# Altium PCB magnets_carrier.PcbDoc
Units mm, origin at the board's own origin, x right, y up, seen from the top; angles counter-clockwise.
Board outline 88.6 x 17.2 mm, 2 copper layers (Top Layer, Bottom Layer); 7 components, 13 nets, 26 pads, 6 vias.
Unrouted connection lines stored in the file: 1.
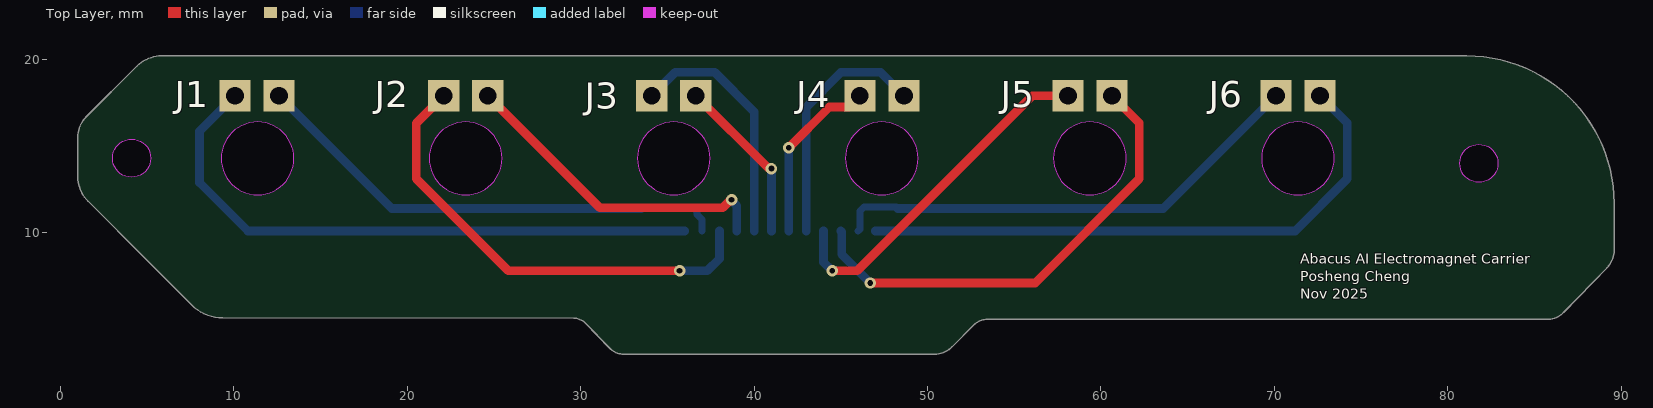
[diagram p0: Top Layer view]
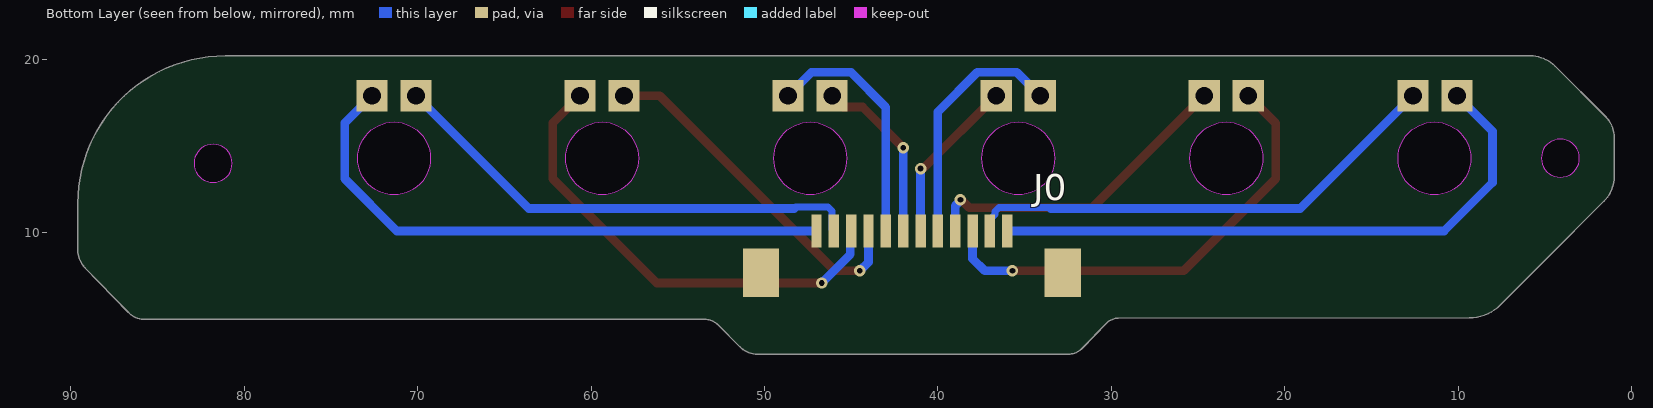
[diagram p1: Bottom Layer view, seen from below]

## Layer stack, top to bottom
Top Solder: solder mask 0.0102, Solder Resist, Dk 3.5
Top Layer: signal copper 0.0356
Dielectric 1: dielectric 0.32, FR-4, Dk 4.8
Bottom Layer: signal copper 0.0356
Bottom Solder: solder mask 0.0102, Solder Resist, Dk 3.5

## Board outline
30.273,4.784 31.672,3.339 ccw(c32.472,4.114) 32.472,3 50.417,3 ccw(c50.417,4.407) 51.412,3.412 52.688,4.688 cw(c53.441,3.934) 53.441,5 85.728,5.001 ccw(c85.73,6.35) 86.698,5.41 89.184,7.973 ccw(c88.142,8.993) 89.6,8.993 89.6,11.7 ccw(c81.1,11.7) 81.1,20.2 5.824,20.2 ccw(c5.824,18.21) 4.417,19.617 1.483,16.683 ccw(c2.648,15.517) 1,15.517 1,13.224 ccw(c2.984,13.224) 1.581,11.821 5.001,8.401 7.573,5.827 ccw(c9.351,7.603) 9.348,5.089 29.609,5.066 cw(c29.608,4.141)
cut-out: 4.1,13.2 cw(c4.1,14.3) 3,14.3 cw(c4.1,14.3) 4.1,15.4 cw(c4.1,14.3) 5.2,14.3 cw(c4.1,14.3)
cut-out: 81.8,12.9 cw(c81.8,14) 80.7,14 cw(c81.8,14) 81.8,15.1 cw(c81.8,14) 82.9,14 cw(c81.8,14)
cut-out: 69.265,14.287 ccw(c71.365,14.287) 71.365,12.187 ccw(c71.365,14.287) 73.465,14.287 ccw(c71.365,14.287) 71.365,16.387 ccw(c71.365,14.287)
cut-out: 45.265,14.287 ccw(c47.365,14.287) 47.365,12.187 ccw(c47.365,14.287) 49.465,14.287 ccw(c47.365,14.287) 47.365,16.387 ccw(c47.365,14.287)
cut-out: 57.265,14.287 ccw(c59.365,14.287) 59.365,12.187 ccw(c59.365,14.287) 61.465,14.287 ccw(c59.365,14.287) 59.365,16.387 ccw(c59.365,14.287)
cut-out: 35.365,12.187 ccw(c35.365,14.287) 37.465,14.287 ccw(c35.365,14.287) 35.365,16.387 ccw(c35.365,14.287) 33.265,14.287 ccw(c35.365,14.287)
cut-out: 21.265,14.287 ccw(c23.365,14.287) 23.365,12.187 ccw(c23.365,14.287) 25.465,14.287 ccw(c23.365,14.287) 23.365,16.387 ccw(c23.365,14.287)
cut-out: 9.265,14.287 ccw(c11.365,14.287) 11.365,12.187 ccw(c11.365,14.287) 13.465,14.287 ccw(c11.365,14.287) 11.365,16.387 ccw(c11.365,14.287)

## Design rules (kind name [scope] priority, off if disabled: settings)
BoardOutlineClearance [All] p1: gap=0.5 ignorepadtopadclearanceinfootprint=FALSE
Clearance [All] p1: gap=0.2 ignorepadtopadclearanceinfootprint=FALSE
HoleSize [All] p1: absolutevalues=TRUE maxlimit=6.3 minlimit=0.15 maxpercent=80.000 minpercent=20.000
PolygonConnect [All] p1: connectstyle=Relief reliefconductorwidth=0.254 reliefentries=4 polygonreliefangle="90 Angle" airgapwidth=0.254
RoutingVias [All] p1: holewidth=0.6 width=0.3 viastyle="Through Hole" minholewidth=0.15 minwidth=0.25 maxholewidth=2.54 maxwidth=1.27
SolderMaskExpansion [All] p1: expansion=0.05 istentingtop=FALSE
SupplyNets "Schematic Supply Nets" [InNet('GND')] p1: voltage=0.000
Width [All] p1: maxlimit=1 minlimit=0.1 preferedwidth=0.5
29 further rules are at their usual default settings.

## Components (designator, comment, footprint, x,y, rotation, side; value= is the part's Value field where it differs from the comment)
J0 "528521270" 528521270 53,1.6 r180 bottom
J1 "Two Pin" TWO_PIN 13.87,19.17 r180 top
J2 "Two Pin" TWO_PIN 25.91,19.17 r180 top
J3 "Two Pin" TWO_PIN 37.91,19.17 r180 top
J4 "Two Pin" TWO_PIN 49.91,19.17 r180 top
J5 "Two Pin" TWO_PIN 61.91,19.17 r180 top
J6 "Two Pin" TWO_PIN 73.91,19.17 r180 top

## Footprints (in the part's own frame and the unit in brackets; to place one, negate y for a bottom-side part, rotate by r counter-clockwise, add the part's x,y. Pads: shape width x height; smd on the part's side, far side on the other; paste and mask are expansions set on the pad)
528521270 [mm]
  rect 0.6x1.9 smd: 1(6,8.5) 2(7,8.5) 3(8,8.5) 4(9,8.5) 5(10,8.5) 6(11,8.5) 7(12,8.5) 8(13,8.5) 9(14,8.5) 10(15,8.5) 11(16,8.5) 12(17,8.5)
  rect 2.1x2.8 smd: P1(2.8,6.1) P2(20.2,6.1)
  body extent 2.35,2.4 20.65,9.2, height 3.1
TWO_PIN [mm]
  rect 1.8x1.8 hole 1.02: 1(1.27,1.27) 2(3.81,1.27)

## Part data
J0: "Easy-On FFC/FPC Connector, 1.00mm Pitch, Surface Mount, Right-Angle, Non-ZIF, Bottom Contact Style, 12 Circuits", Manufacturer_Name="Molex Connector Corporation", Copyright="Copyright (C) 2025 Ultra Librarian. All rights reserved.", Manufacturer_Part_Number=528521270, RefDes=RefDes, System=Connector, Type=Type
J1 J2 J3 J4 J5 J6: library part two_pin

## Via types
v1: diameter 0.66, hole 0.33, Top Layer to Bottom Layer, tented both sides, 6 vias

## Nets (pads, with @x,y where several pads share a name; then routed paths per layer and width w, separated by ;. In a path a pad name is that pad's centre, name@x,y a point inside that pad or via, vN(x,y) a via of type N, cw(c..) or ccw(c..) an arc to the next point about the centre after c; other vN are vias at no path point)
GND: J0.P1 J0.P2
NetJ0_1: J0.1 J6.1 | length 33.9
  Bottom Layer w0.5: J0.1 71.208,10.1 74.215,13.107 74.215,16.325 J6.1
NetJ0_2: J0.2 J6.2 | length 28
  Bottom Layer w0.4: J0.2 46.1,10.2 46.1,11.253 46.334,11.487 48.213,11.487 48.3,11.4
  Bottom Layer w0.5: 48.3,11.4 63.6,11.4 J6.2
NetJ0_3: J0.3 J5.1 | length 27.2
  Top Layer w0.5: v1(46.7,7.1) 56.208,7.1 62.215,13.107 62.215,16.325 J5.1
  Bottom Layer w0.5: J0.3 45.05,10.05 45.05,8.75 v1(46.7,7.1)
NetJ0_4: J0.4 J5.2 | length 20.3
  Top Layer w0.5: v1(44.5,7.8) 45.947,7.8 56.047,17.9 J5.2
  Bottom Layer w0.5: J0.4 44,8.3 v1(44.5,7.8)
NetJ0_5: J0.5 J4.1 | length 14.2
  Bottom Layer w0.5: J0.5 43,17.236 45.014,19.25 47.29,19.25 J4.1
NetJ0_6: J0.6 J4.2 | length 10.1
  Top Layer w0.5: v1(42,14.9) 44.35,17.25 45.45,17.25 J4.2
  Bottom Layer w0.5: J0.6 v1(42,14.9)
NetJ0_7: J0.7 J3.1 | length 9.7
  Top Layer w0.5: J3.1 40.809,13.731 40.969,13.731 v1(41,13.7)
  Bottom Layer w0.5: J0.7 v1(41,13.7)
NetJ0_8: J0.8 J3.2 | length 14.3
  Bottom Layer w0.5: J3.2 35.45,19.25 37.726,19.25 40,16.976 J0.8
NetJ0_9: J0.9 J2.1 | length 18.9
  Top Layer w0.5: J2.1 31.103,11.437 38.194,11.437 38.657,11.9 v1(38.7,11.9)
  Bottom Layer w0.5: v1(38.7,11.9) 38.7,11.857 39,11.557 J0.9
NetJ0_10: J0.10 J2.2 | length 27
  Top Layer w0.5: J2.2 20.515,16.315 20.515,13.107 25.822,7.8 v1(35.7,7.8)
  Bottom Layer w0.5: v1(35.7,7.8) 37.3,7.8 38,8.5 J0.10
NetJ0_11: J0.11 J1.1 | length 28.2
  Bottom Layer w0.4: 33.5,11.4 33.55,11.45 36.466,11.45 36.7,11.216 36.7,11.05 37,10.75 J0.11
  Bottom Layer w0.5: J1.1 19.1,11.4 33.5,11.4
NetJ0_12: J0.12 J1.2 | length 35
  Bottom Layer w0.5: J1.2 8.015,15.855 8.015,12.9 10.815,10.1 J0.12

## Silkscreen, mask and mechanical layers (free items; w line width, h text height)
Top Overlay:
  text "Abacus AI Electromagnet Carrier / Posheng Cheng / Nov 2025" at 71.5,6 h1
Mechanical 1:
  circle w0.006: c71.365,14.287 r2.1
  circle w0.006: c59.365,14.287 r2.1
  circle w0.006: c35.365,14.287 r2.1
  circle w0.006: c47.365,14.287 r2.1
  circle w0.006: c23.365,14.287 r2.1
  circle w0.006: c11.365,14.287 r2.1
  circle w0.006: c1.865,20.9 r1.35
  circle w0.006: c1.865,7.675 r1.35
  circle w0.006: c11.365,14.287 r2.1
  circle w0.006: c23.365,14.287 r2.1
  circle w0.006: c47.365,14.287 r2.1
  circle w0.006: c35.365,14.287 r2.1
  circle w0.006: c59.365,14.287 r2.1
  circle w0.006: c71.365,14.287 r2.1
  lines w0.006: 0.065,5.05 4.365,5.05 4.365,8.287 89.665,8.287 89.665,20.287 4.365,20.287 4.365,23.525 0.065,23.525 0.065,5.05 ; 7.988,16.237 cw(c11.365,14.287) 14.743,16.237 13.876,15.737 ccw(c11.365,14.287) 8.854,15.737 7.988,16.237 ; 19.988,16.237 cw(c23.365,14.287) 26.743,16.237 25.876,15.737 ccw(c23.365,14.287) 20.854,15.737 19.988,16.237 ; 31.988,16.237 cw(c35.365,14.287) 38.743,16.237 37.876,15.737 ccw(c35.365,14.287) 32.854,15.737 31.988,16.237 ; 43.988,16.237 cw(c47.365,14.287) 50.743,16.237 49.876,15.737 ccw(c47.365,14.287) 44.854,15.737 43.988,16.237 ; 55.988,16.237 cw(c59.365,14.287) 62.743,16.237 61.876,15.737 ccw(c59.365,14.287) 56.854,15.737 55.988,16.237 ; 67.988,16.237 cw(c71.365,14.287) 74.743,16.237 73.876,15.737 ccw(c71.365,14.287) 68.854,15.737 67.988,16.237
Board Shape:
  lines w0.2: 1,12.402 5.001,8.401 8.308,5.09 30.001,5.065 32,3.066 32,3 51,3 53,5 53,5.039 86.3,5 89.6,8.402 89.6,20.2 5,20.2 1,16.2 1,12.402 ; 3,14.3 cw(c4.1,14.3) 4.1,15.4 cw(c4.1,14.3) 5.2,14.3 cw(c4.1,14.3) 4.1,13.2 cw(c4.1,14.3) 3,14.3 ; 9.265,14.287 cw(c11.365,14.287) 11.365,16.387 cw(c11.365,14.287) 13.465,14.287 cw(c11.365,14.287) 11.365,12.187 cw(c11.365,14.287) 9.265,14.287 ; 21.265,14.287 cw(c23.365,14.287) 23.365,16.387 cw(c23.365,14.287) 25.465,14.287 cw(c23.365,14.287) 23.365,12.187 cw(c23.365,14.287) 21.265,14.287 ; 33.265,14.287 ccw(c35.365,14.287) 35.365,12.187 ccw(c35.365,14.287) 37.465,14.287 ccw(c35.365,14.287) 35.365,16.387 ccw(c35.365,14.287) 33.265,14.287 ; 45.265,14.287 cw(c47.365,14.287) 47.365,16.387 cw(c47.365,14.287) 49.465,14.287 cw(c47.365,14.287) 47.365,12.187 cw(c47.365,14.287) 45.265,14.287 ; 57.265,14.287 cw(c59.365,14.287) 59.365,16.387 cw(c59.365,14.287) 61.465,14.287 cw(c59.365,14.287) 59.365,12.187 cw(c59.365,14.287) 57.265,14.287 ; 69.265,14.287 cw(c71.365,14.287) 71.365,16.387 cw(c71.365,14.287) 73.465,14.287 cw(c71.365,14.287) 71.365,12.187 cw(c71.365,14.287) 69.265,14.287 ; 80.7,14 cw(c81.8,14) 81.8,15.1 cw(c81.8,14) 82.9,14 cw(c81.8,14) 81.8,12.9 cw(c81.8,14) 80.7,14